# Altium PCB New_JTAG_to HDMI.PcbDoc
Units mm, origin at the board's own origin, x right, y up, seen from the top; angles counter-clockwise.
Board outline 27.8 x 34 mm, 2 copper layers (Top Layer, Bottom Layer), stack 1.671 mm thick; 4 components, 8 nets, 51 pads, 4 vias.
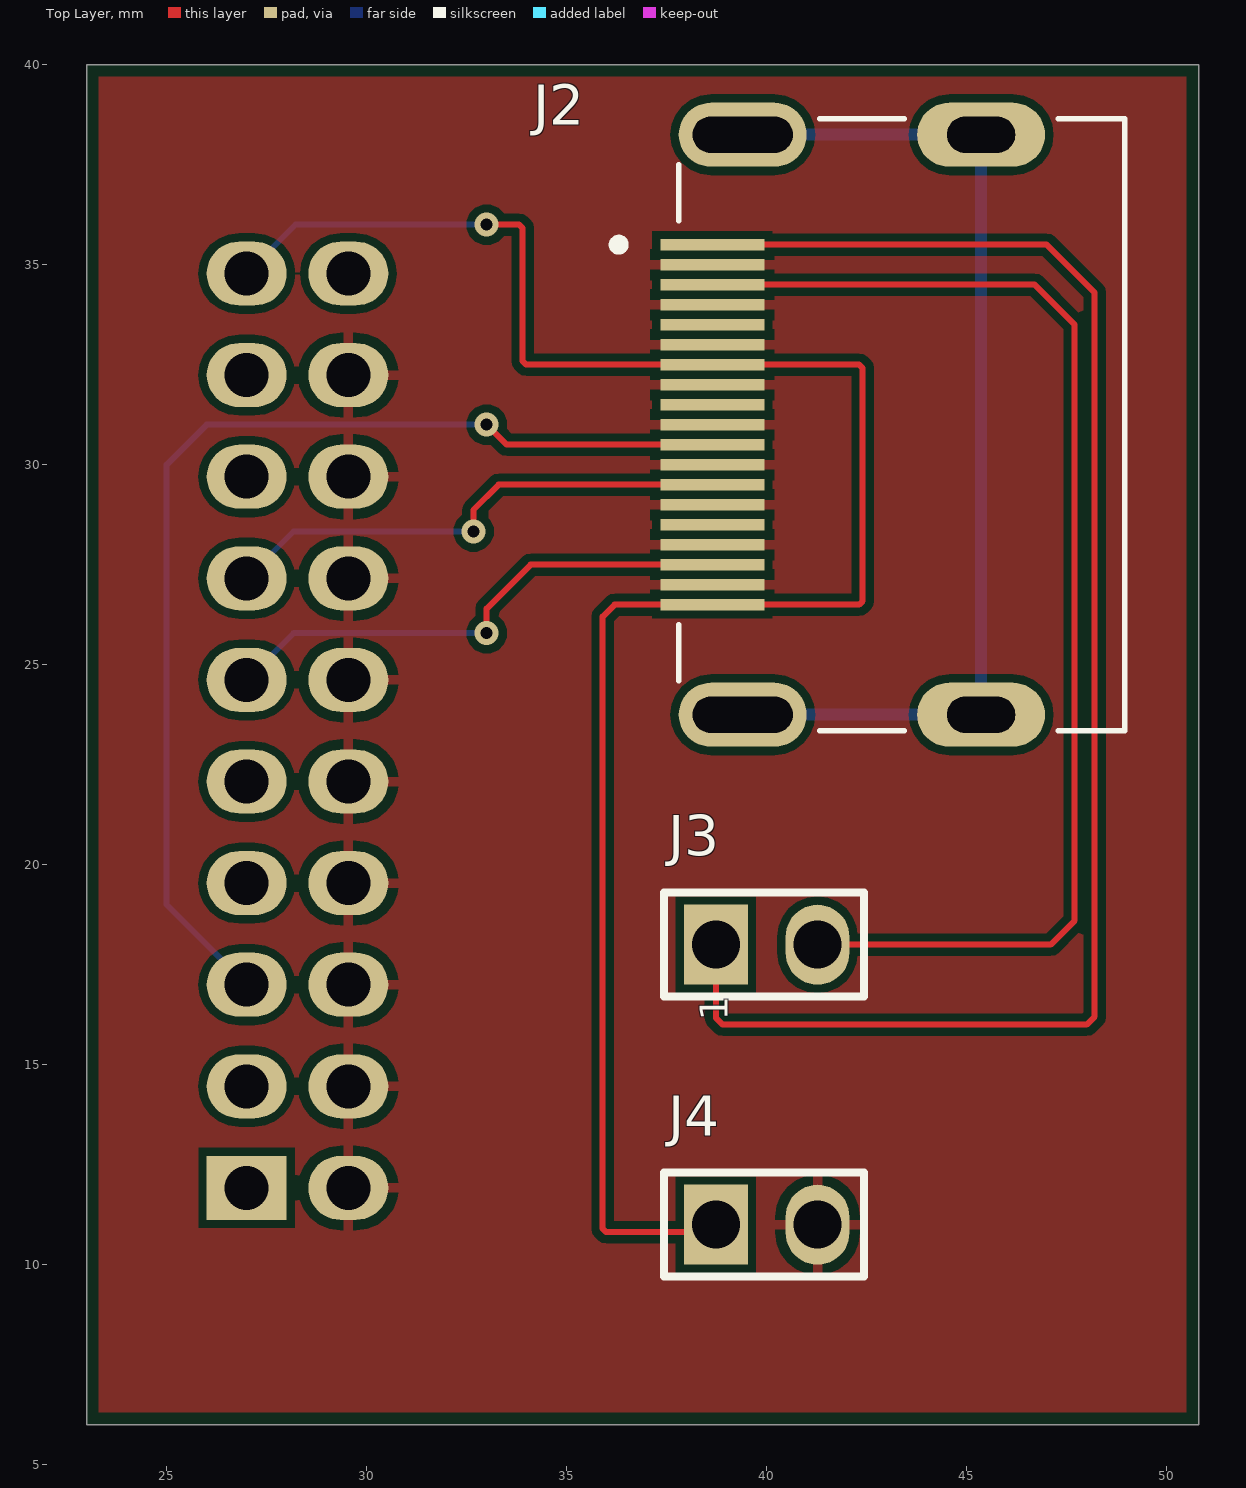
[diagram p0: Top Layer view]
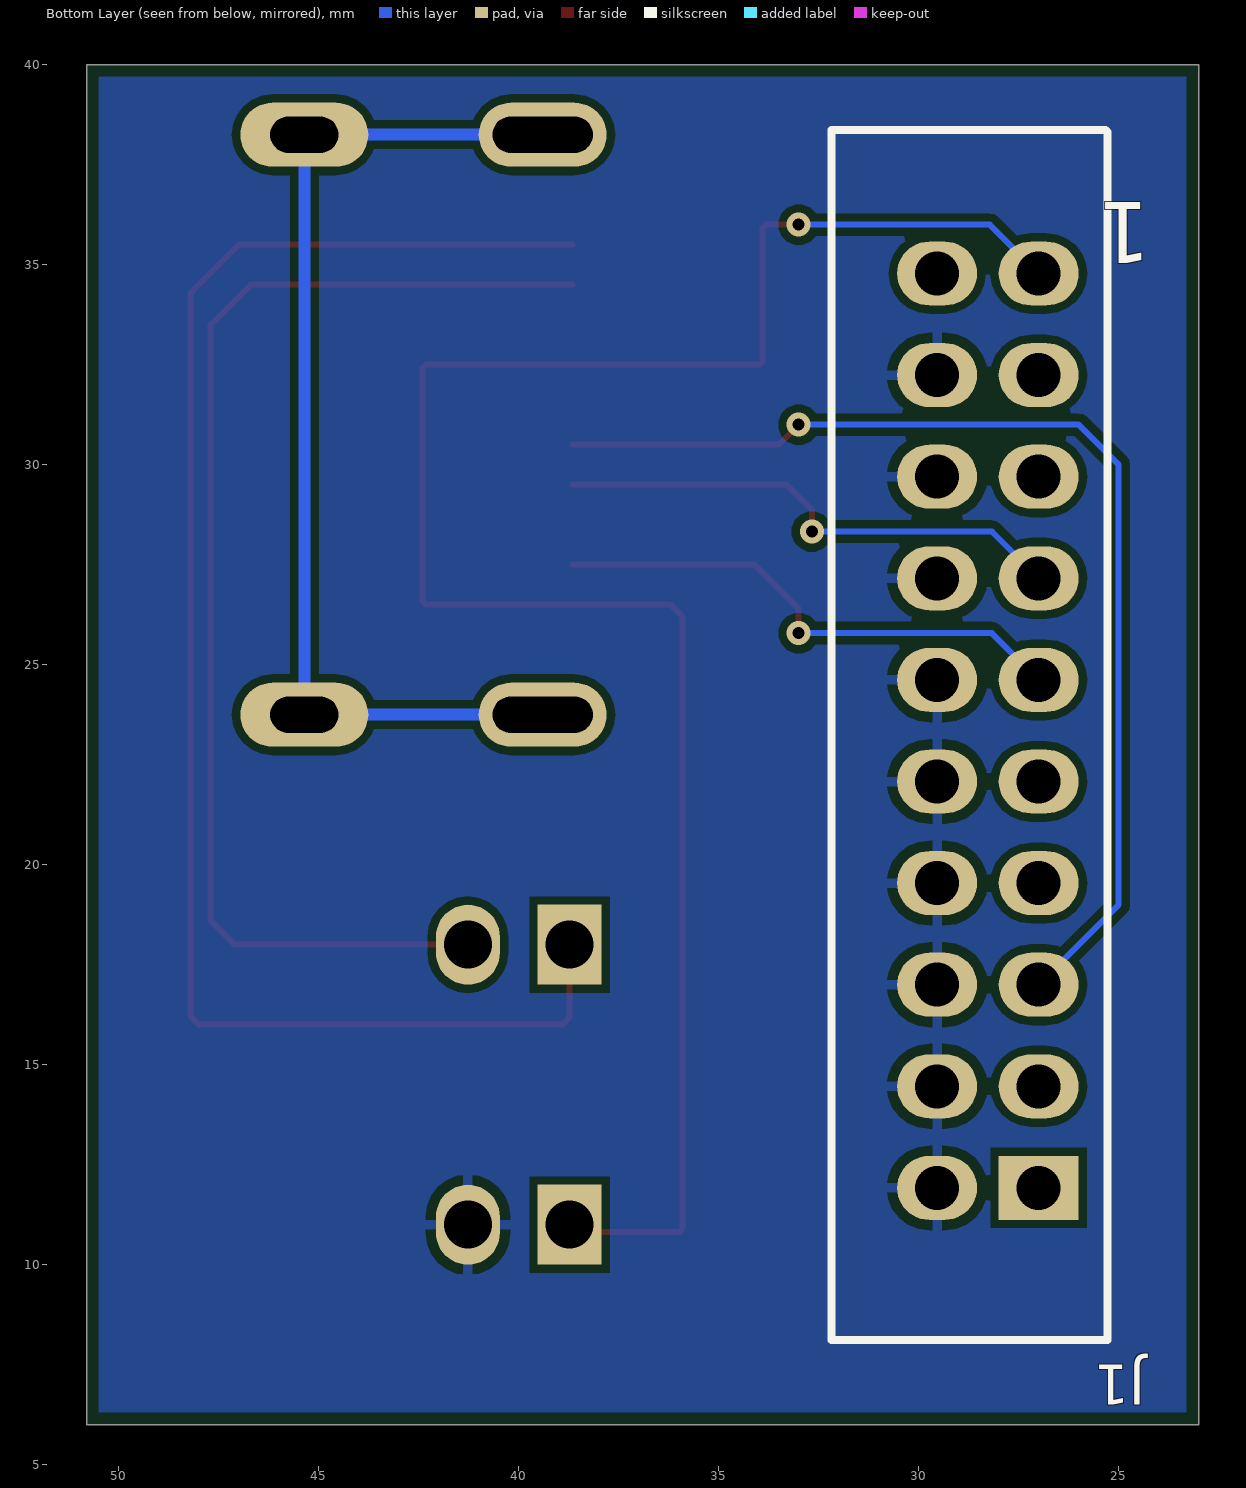
[diagram p1: Bottom Layer view, seen from below]

## Layer stack, top to bottom
Top Solder: solder mask 0.0102, Solder Resist, Dk 3.5
Top Layer: signal copper 0.0356
Dielectric 1: core 1.6, Core-025, Dk 4.6
Bottom Layer: signal copper 0.0356
Bottom Solder: solder mask 0.0102, Solder Resist, Dk 3.5

## Board outline
23,6 50.8,6 50.8,40 23,40

## Design rules (kind name [scope] priority, off if disabled: settings)
BoardOutlineClearance [All] p1: gap=0.3 ignorepadtopadclearanceinfootprint=FALSE
Clearance [All] p1: gap=0.2 ignorepadtopadclearanceinfootprint=FALSE
HoleToHoleClearance [All] p1: gap=0 allowstackedmicrovias=TRUE
MinimumSolderMaskSliver [All] p1: minsoldermaskwidth=0
PasteMaskExpansion [All] p1: expansion=-0.25
PolygonConnect [All] p1: connectstyle=Relief reliefconductorwidth=0.25 reliefentries=4 polygonreliefangle="90 Angle" airgapwidth=0.25
RoutingVias [All] p1: holewidth=0.3 width=0.6 viastyle="Through Hole" minholewidth=0.3 minwidth=0.6 maxholewidth=0.3 maxwidth=0.6
SilkToSilkClearance [All] p1: silktosilkclearance=0.1
SilkToSolderMaskClearance [IsPad] p1: minsilkscreentomaskgap=0.1 clearancetoexposedcopper=TRUE
SolderMaskExpansion [All] p1: expansion=0.102 istentingtop=FALSE
Width [All] p1: maxlimit=1 minlimit=0.15 preferedwidth=0.15
25 further rules are at their usual default settings.

## Components (designator, comment, footprint, x,y, rotation, side; value= is the part's Value field where it differs from the comment)
J1 "SBH11-PBPC-D10-ST-BK" SBH11-PBPC-D10-ST-BK 27,11.92 r0 bottom
J2 "RAHHD19TR" SWITCHCRAFT_RAHHD19TR 42,31 r90 top
J3 "1x2 header (Rx/Tx)" DS1021-1*2SF1-1 40,18 r90 top
J4 "1x2 header (VCC/GND)" DS1021-1*2SF1-1 40,11 r90 top

## Footprints (in the part's own frame and the unit in brackets; to place one, negate y for a bottom-side part, rotate by r counter-clockwise, add the part's x,y. Pads: shape width x height; smd on the part's side, far side on the other; paste and mask are expansions set on the pad)
DS1021-1*2SF1-1 [mm]
  rect 2x1.6 hole 1.2: 1(0,1.27) 1(0,1.27)
  oval 2x1.6 hole 1.2: 2(0,-1.27) 2(0,-1.27)
  silkscreen extent -1.3,-2.43 1.3,2.57, body extent -1.17,-2.47 1.47,2.64, height 5.51
SBH11-PBPC-D10-ST-BK [mm]
  oval 2x1.6 hole 1.1: 1(0,-22.86) 2(2.54,-22.86) 3(0,-20.32) 4(2.54,-20.32) 5(0,-17.78) 6(2.54,-17.78) 7(0,-15.24) 8(2.54,-15.24) 9(0,-12.7) 10(2.54,-12.7) 11(0,-10.16) 12(2.54,-10.16) 13(0,-7.62) 14(2.54,-7.62) 15(0,-5.08) 16(2.54,-5.08) 17(0,-2.54) 18(2.54,-2.54) 20(2.54,0)
  rect 2x1.6 hole 1.1: 19(0,0)
  silkscreen extent -1.73,-26.45 5.17,3.8, body extent -2.65,-26.56 4.45,3.76, height 8.51
SWITCHCRAFT_RAHHD19TR [mm]
  rect 0.28x2.6 smd: 1(4.5,3.36) 2(4,3.36) 3(3.5,3.36) 4(3,3.36) 5(2.5,3.36) 6(2,3.36) 7(1.5,3.36) 8(1,3.36) 9(0.5,3.36) 10(0,3.36) 11(-0.5,3.36) 12(-1,3.36) 13(-1.5,3.36) 14(-2,3.36) 15(-2.5,3.36) 16(-3,3.36) 17(-3.5,3.36) 18(-4,3.36) 19(-4.5,3.36)
  oval 1.6x3.2 hole 0.9 slot 2.5 at 90 deg: SH1(-7.25,2.6) SH2(7.25,2.6)
  oval 1.6x3.2 hole 0.9 slot 1.7 at 90 deg: SH3(-7.25,-3.36) SH4(7.25,-3.36)
  silkscreen extent -7.65,-6.95 7.65,5.8, body extent -7.6,-7.97 7.7,4.17, height 6.17

## Part data
J1: "Conn Shrouded Header (4 Sides) HDR 20 POS 2.54mm Solder ST Top Entry Thru-Hole", Manufacturer=Sullins, Supplier Part Number=S9172-ND, Category=Connectors, ComponentLink1Description=https://datasheet.ciiva.com/730/sbh11-pbpc-dxx-st-xx-730919.pdf?src-supplier=Digikey, ComponentLink1URL=https://datasheet.ciiva.com/730/sbh11-pbpc-dxx-st-xx-730919.pdf?src-supplier=Digikey, ComponentLink2Description="Chipdip link", ComponentLink2URL=https://www.chipdip.ru/product0/8005812384, Manufacturer Part Number=SBH11-PBPC-D10-ST-BK, Pricing="1=0,65, 10=0,496, 80=0,38963, 440=0,32211, 945=0,29663, 4900=0,25024, 10000=0,2457 (USD)", RoHS=Yes, Stock=20189, Supplier=Digikey, Supplier 1=https://www.chipdip.ru/product0/8005812384
J2: "HDMI HDMI 2.0 Receptacle Connector 19 Position Surface Mount, Right Angle; Through Hole", Package=None, Availability="In Stock", Check_prices=https://www.snapeda.com/parts/RAHHD19TR/Switchcraft+%252F+Conxall/view-part/?ref=eda, ComponentLink1Description="Chipdip link", ComponentLink1URL=https://www.chipdip.ru/product0/8007174530, MF="Switchcraft Inc.", MP=RAHHD19TR, Price=None, Purchase-URL=https://pricing.snapeda.com/search/part/RAHHD19TR/?ref=eda, SnapEDA_Link=https://www.snapeda.com/parts/RAHHD19TR/Switchcraft+%252F+Conxall/view-part/?ref=snap, Supplier 1=https://www.chipdip.ru/product0/8007174530
J3: library part DS1021-1*2SF1-1_1, Manufacturer="Ningbo Connfly Electric", Manufacturer Part Number=DS1021-1*2SF1-1, Supplier Part Number=1390105, ComponentLink1Description="Chipdip link", ComponentLink1URL=https://www.chipdip.ru/product0/8009330828, Pricing="1=0,11 (EUR)", RoHS=No, Supplier=Conrad, Supplier 1=https://www.chipdip.ru/product0/8009330828
J4: library part DS1021-1*2SF1-1, Manufacturer="Ningbo Connfly Electric", Supplier Part Number=1390105, ComponentLink1Description="Chipdip link", ComponentLink1URL=https://www.chipdip.ru/product0/8009330828, Manufacturer Part Number=DS1021-1*2SF1-1, Pricing="1=0,11 (EUR)", RoHS=No, Supplier=Conrad, Supplier 1=https://www.chipdip.ru/product0/8009330828

## Via types
v1: diameter 0.6, hole 0.3, Top Layer to Bottom Layer, 4 vias

## Nets (pads, with @x,y where several pads share a name; then routed paths per layer and width w, separated by ;. In a path a pad name is that pad's centre, name@x,y a point inside that pad or via, vN(x,y) a via of type N, cw(c..) or ccw(c..) an arc to the next point about the centre after c; other vN are vias at no path point)
GND: J1.4 J1.6 J1.8 J1.10 J1.12 J1.14 J1.16 J1.18 J1.20 J2.2 J2.4 J2.6 J2.8 J2.10 J2.12 J2.14 J2.16 J2.18 J4.2
RESET: J1.15 J2.11 | length 28.1
  Top Layer w0.15: v1(33,31) 33.5,30.5 J2.11
  Bottom Layer w0.15: J1.15 25,19 25,30 26,31 v1(33,31)
Rx: J2.3 J3.2 | length 31.1
  Top Layer w0.15: J2.3 46.7,34.5 47.7,33.5 47.7,18.6 47.1,18 J3.2@41.27,18
SWCLK: J1.9 J2.17 | length 13.2
  Top Layer w0.15: v1(33,25.79) 33,26.4 34.1,27.5 J2.17
  Bottom Layer w0.15: J1.9 28.17,25.79 v1(33,25.79)
SWDIO: J1.7 J2.13 | length 12.9
  Top Layer w0.15: v1(32.67,28.33) 32.67,28.87 33.3,29.5 J2.13
  Bottom Layer w0.15: J1.7 28.17,28.33 v1(32.67,28.33)
Tx: J2.1 J3.1 | length 39.6
  Top Layer w0.15: J2.1 47,35.5 48.2,34.3 48.2,16.2 48,16 38.9,16 38.73,16.17 J3.1@38.73,18
V_1: J2.SH1 J2.SH2 J2.SH3 J2.SH4 | length 26.4
  Bottom Layer w0.3: J2.SH1 J2.SH3 J2.SH4 J2.SH2
VCC: J1.1 J2.7 J2.19 J4.1 | length 50.1
  Top Layer w0.15: v1(33,36) 33.812,36 33.9,35.912 33.9,32.588 33.988,32.5 J2.7 42.312,32.5 42.4,32.412 42.4,26.588 42.312,26.5 J2.19 36.2,26.5 35.9,26.2 35.9,10.9 35.988,10.812 38.542,10.812 J4.1@38.73,11
  Bottom Layer w0.15: J1.1 28.22,36 v1(33,36)
pads on no net: J1.2 J1.3 J1.5 J1.11 J1.13 J1.17 J1.19 J2.5 J2.9 J2.15

## Polygon pours and split planes (outlines as drawn)
GND on Top Layer "GND" (solid, pour order 0): 23,40 50.8,40 50.8,6 23,6
GND on Bottom Layer "GND" (solid, pour order 1): 23,40 50.8,40 50.8,6 23,6

## Text inside footprints (layer, text, board x,y; h text height)
J1: Bottom Overlay "1" at 24.204,36.566 h1.52 r180
J3: Top Overlay "1" at 39.03,16.1 h0.7 r90